# Altium PCB JWpulsegen-V3.PcbDoc
Units mm, origin at the board's own origin, x right, y up, seen from the top; angles counter-clockwise.
Board outline 82.4 x 38.6 mm, 4 copper layers (Top Layer, Layer 1, Layer 2, Bottom Layer), stack 1.587 mm thick; 37 components, 17 nets, 96 pads, 146 vias.
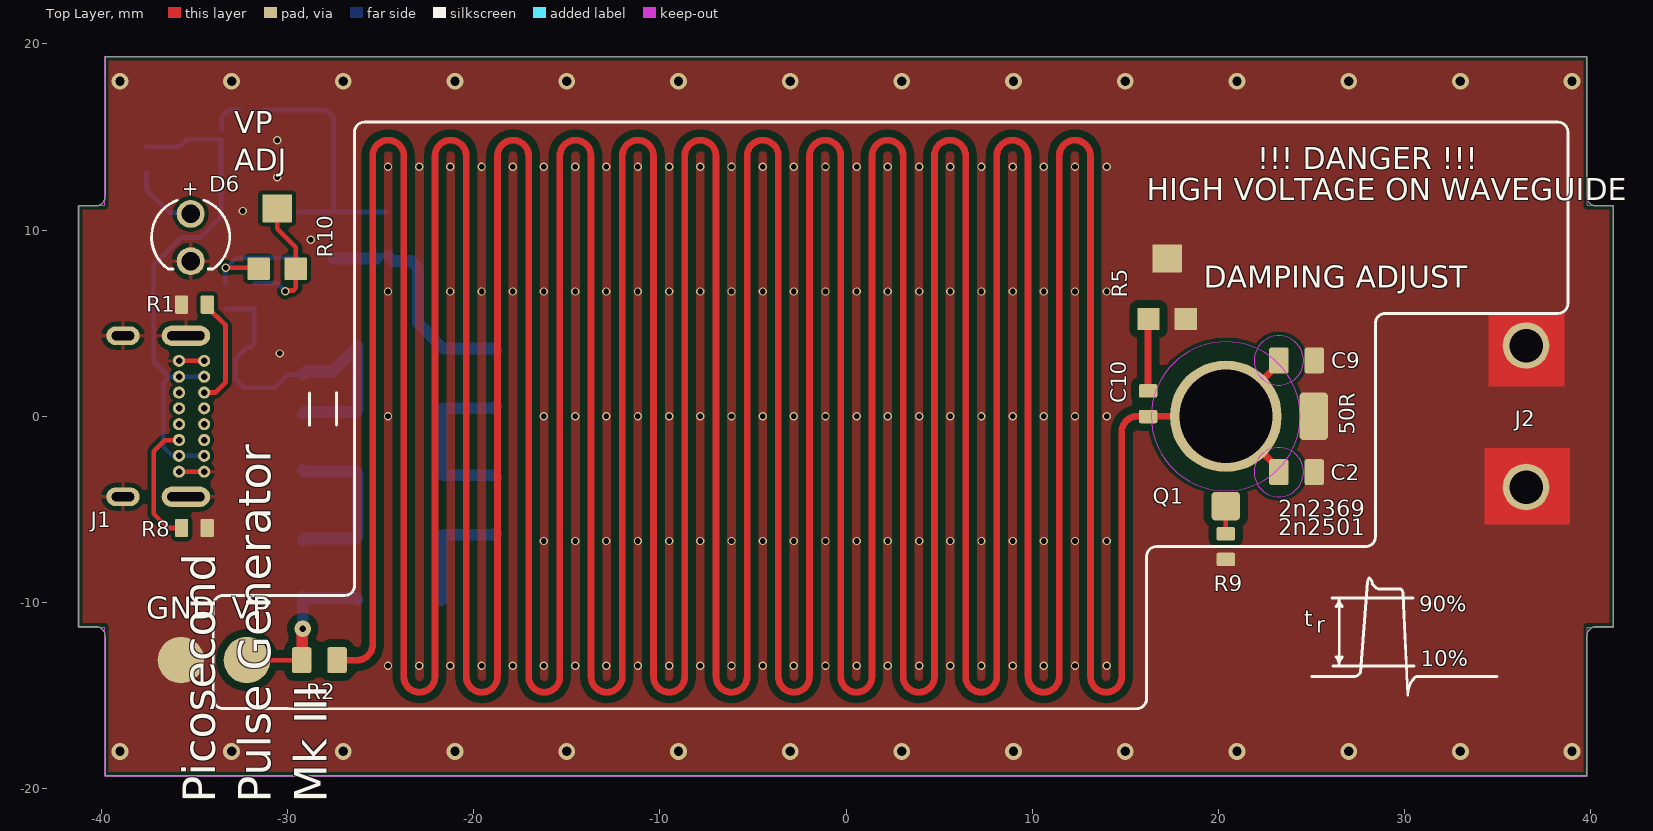
[diagram p0: Top Layer view]
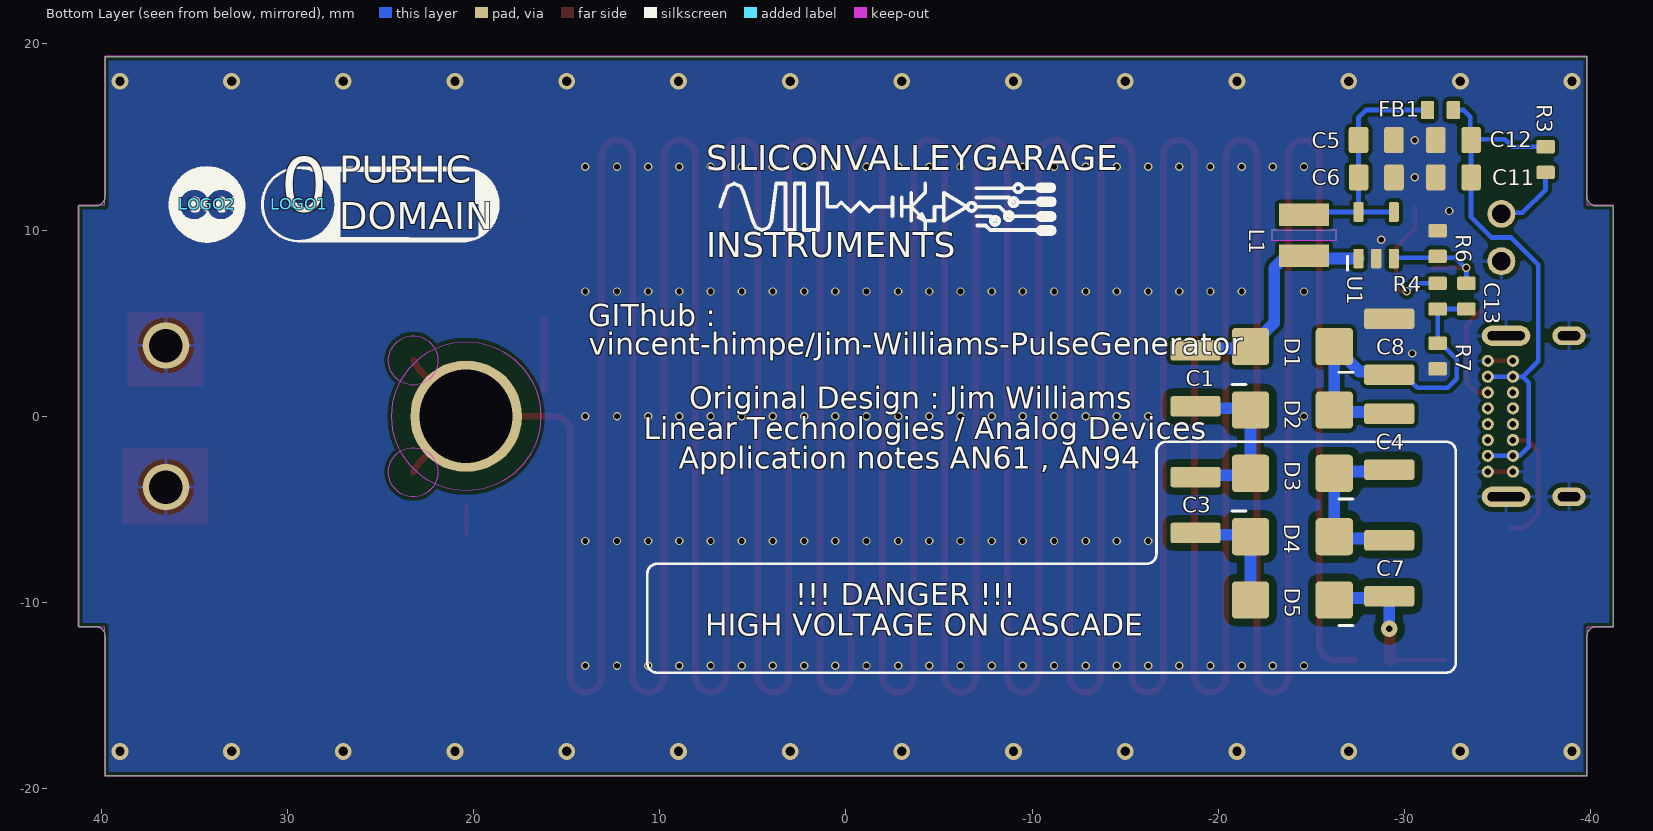
[diagram p1: Bottom Layer view, seen from below]
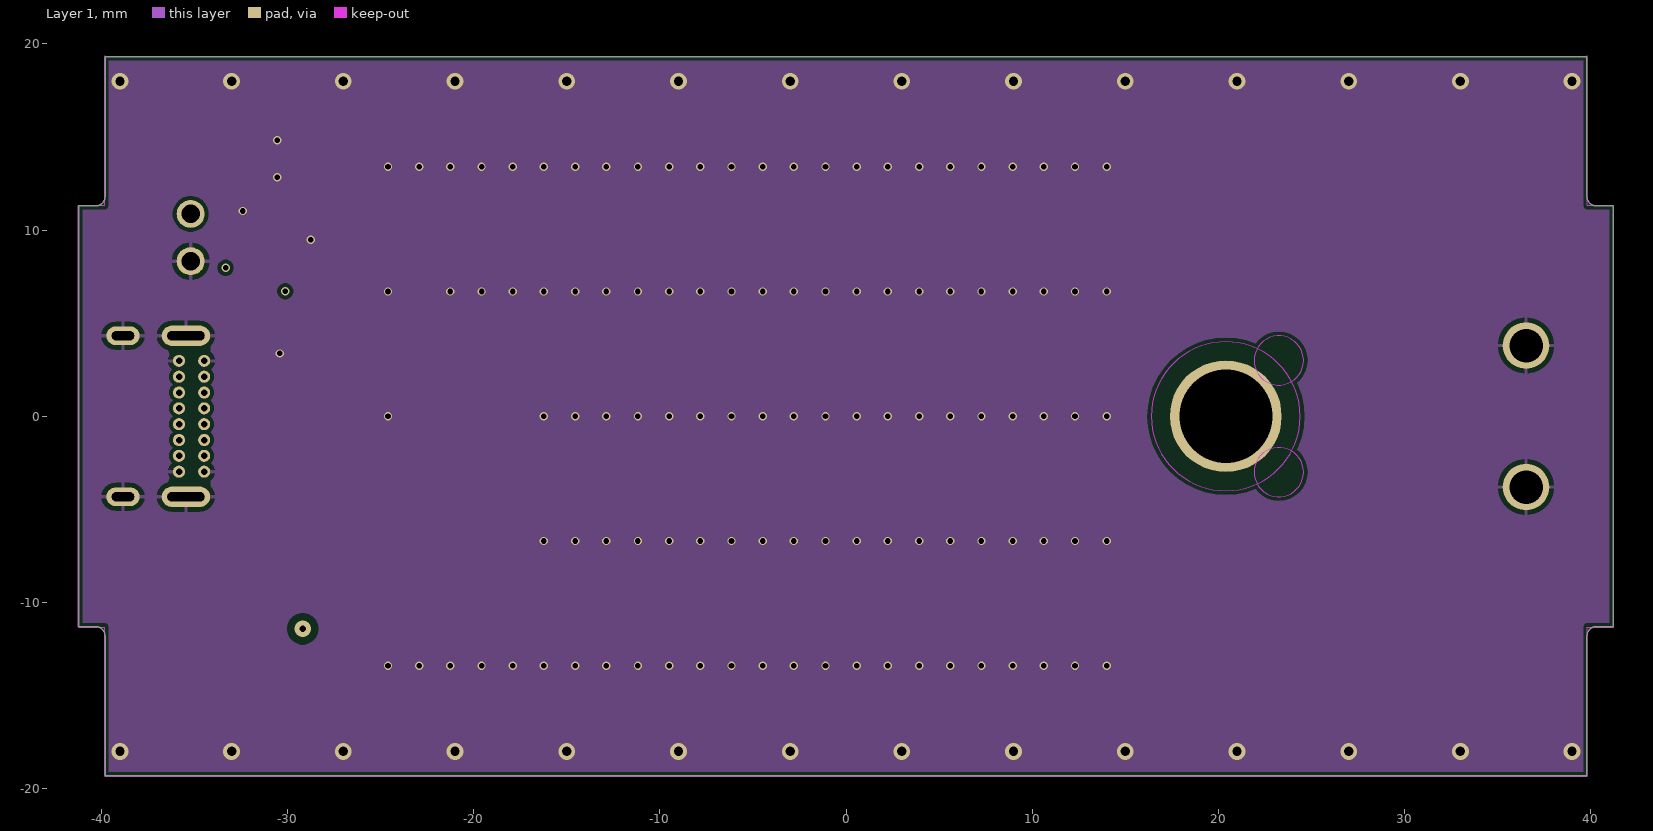
[diagram p2: Layer 1]
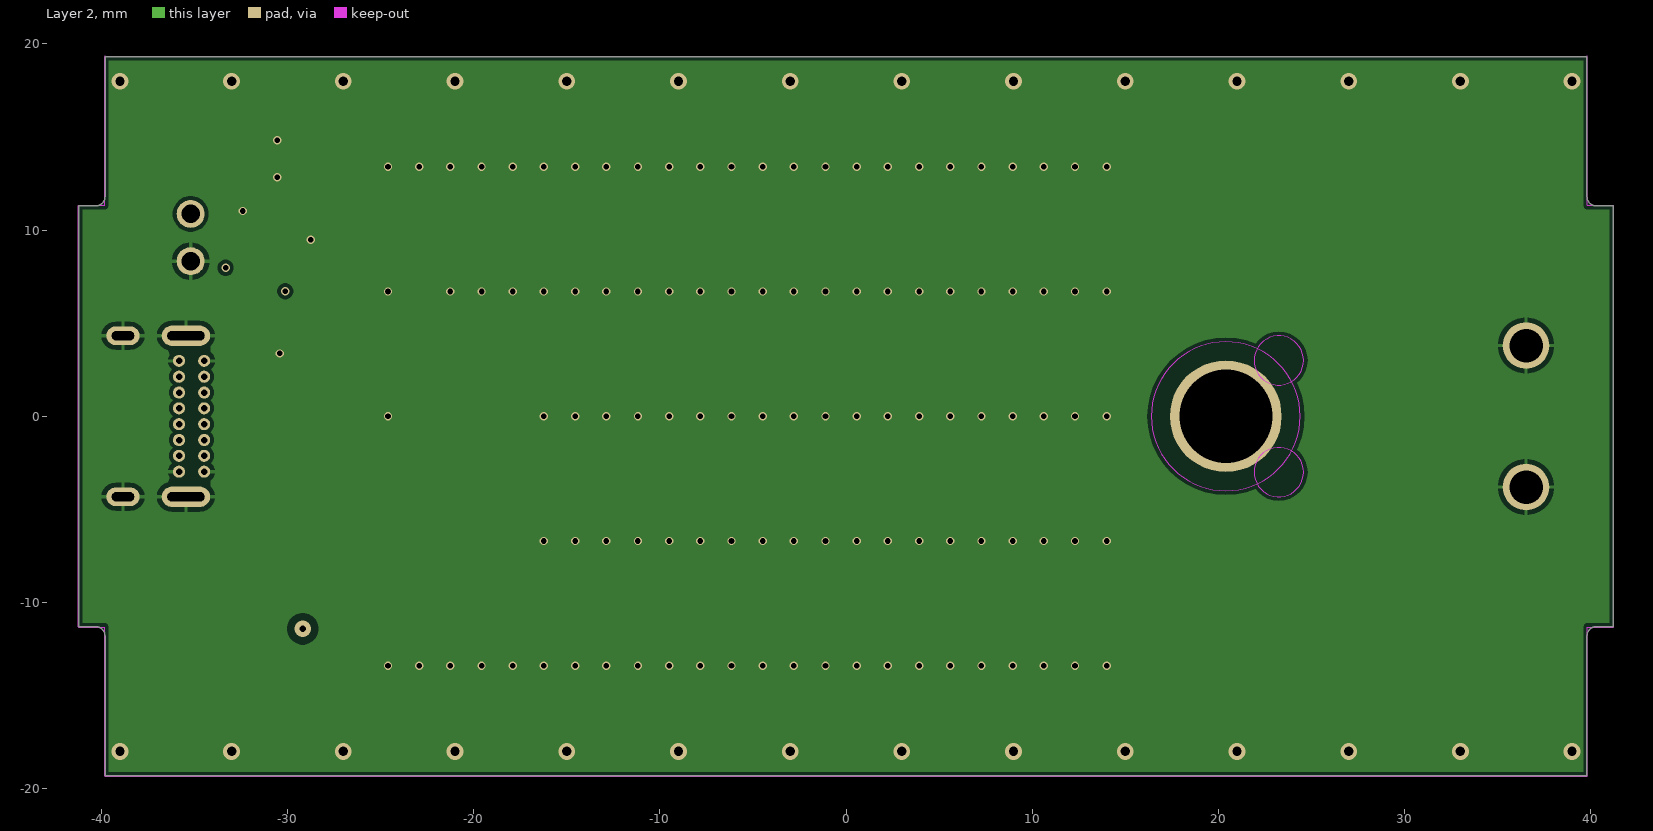
[diagram p3: Layer 2]
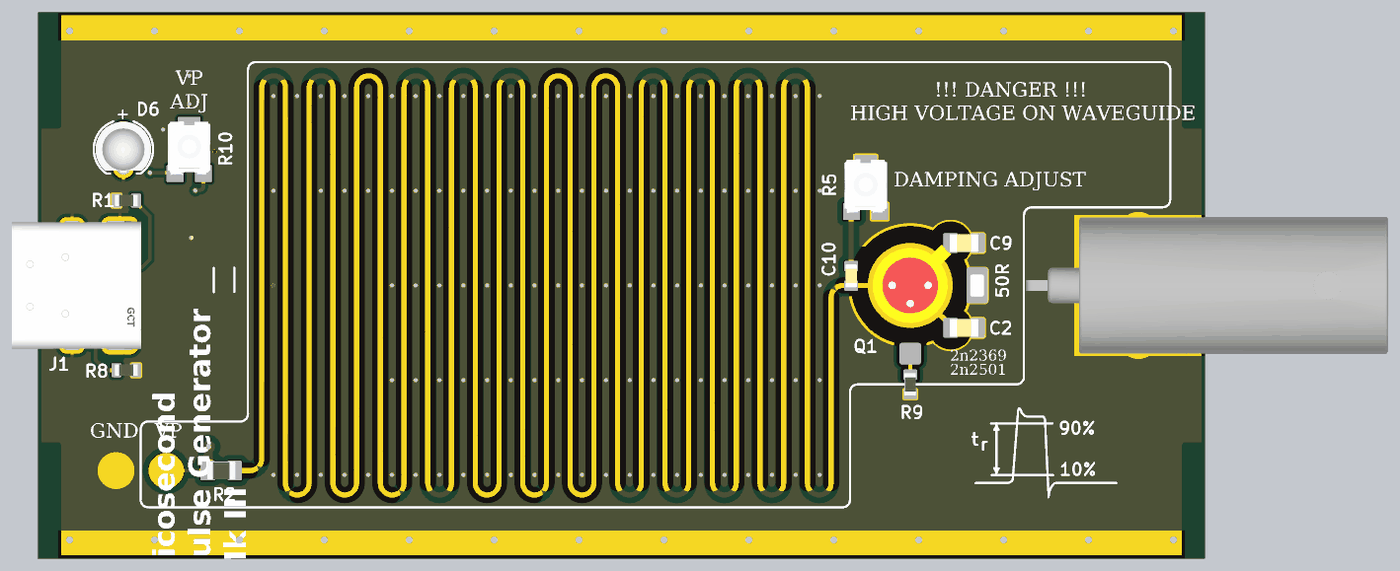
[diagram p4: 3D render of the assembled board from above, using the file's embedded part models]
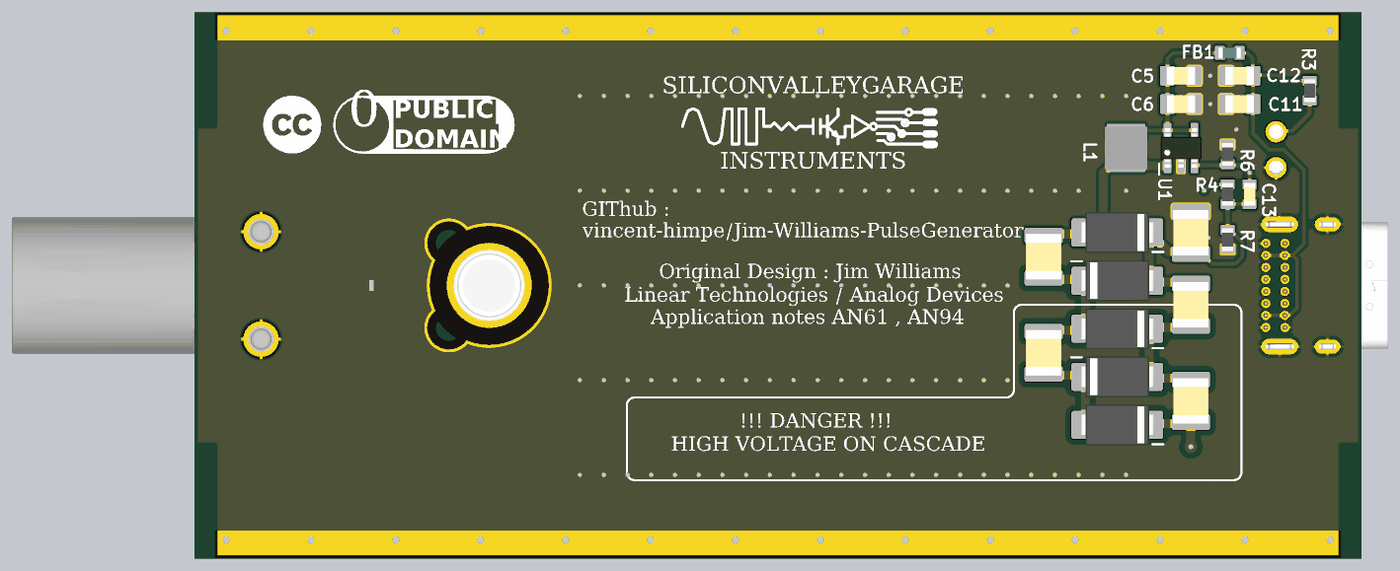
[diagram p5: 3D render of the assembled board from below, using the file's embedded part models]

## Layer stack, top to bottom
Top Solder: solder mask 0.0102, Solder Resist, Dk 3.5
Top Layer: signal copper 0.0356
Dielectric 1: prepreg 0.2104, 7628 X 1, Dk 4.5
Layer 1: signal copper 0.0152
Dielectric1: core 1.065, FR-4, Dk 4.8
Layer 2: signal copper 0.0152
Dielectric 2: prepreg 0.2104, 7628 X 1, Dk 4.5
Bottom Layer: signal copper 0.0356
Bottom Solder: solder mask 0.0102, Solder Resist, Dk 3.5

## Board outline
-41.2,-11.3 -40.3,-11.3 cw(c-40.3,-11.8) -39.8,-11.8 -39.8,-19.3 39.8,-19.3 39.8,-11.8 cw(c40.3,-11.8) 40.3,-11.3 40.298,-11.3 41.2,-11.3 41.2,11.3 40.3,11.3 cw(c40.3,11.8) 39.8,11.8 39.8,19.3 -39.8,19.3 -39.8,11.8 cw(c-40.3,11.8) -40.3,11.3 -41.2,11.3

## Design rules (kind name [scope] priority, off if disabled: settings)
AssemblyTestPointUsage [All] p1 off:
AssemblyTestpoint [All] p1 off: testpointundercomponent=TRUE minsize=1.016 maxsize=2.54 preferedsize=1.524 minholesize=0 maxholesize=1.016 preferedholesize=0.813 testpointgrid=0.025 usegrid=TRUE gridtolerance=0 allowsidetop=TRUE allowsidebottom=TRUE
Clearance WAVEGUIDE-Clearance [InNetClass('WAVEGUIDE') AND OnTopLayer vs InNet('GND')] p1: gap=0.4 ignorepadtopadclearanceinfootprint=FALSE
Clearance HV-CLEARANCE [InNetClass('HV')] p2: gap=0.4 ignorepadtopadclearanceinfootprint=FALSE
Clearance All [All] p3: gap=0.2 ignorepadtopadclearanceinfootprint=FALSE
ComponentClearance [All] p1 off: gap=0.254 collisioncheckmode=3 verticalgap=0.254 showdistances=FALSE
DiffPairsRouting [All] p1 off: maxlimit=0.254 minlimit=0.254 mostfreqgap=0.254 toplayer_minwidth=0.381 toplayer_maxwidth=0.381 toplayer_prefwidth=0.381 midlayer1_minwidth=0.381 midlayer1_maxwidth=0.381 midlayer1_prefwidth=0.381 midlayer2_minwidth=0.381 midlayer2_maxwidth=0.381 midlayer2_prefwidth=0.381 bottomlayer_minwidth=0.381 bottomlayer_maxwidth=0.381 bottomlayer_prefwidth=0.381 maxuncoupledlength=12.7
FabricationTestPointUsage [All] p1 off: valid=0 allowmultiple=FALSE
FabricationTestpoint [All] p1 off: side=3 testpointundercomponent=TRUE minsize=1.016 maxsize=2.54 preferedsize=1.524 minholesize=0 maxholesize=1.016 preferedholesize=0.813 testpointgrid=0.025 allowsidetop=TRUE allowsidebottom=TRUE usegrid=TRUE gridtolerance=0
FanoutControl Fanout_BGA [IsBGA] p1 off: bgadir=Out bgaviamode=Centered fanoutstyle=Auto fanoutdirection=Alternating viagrid=0.025 // Fanout_BGA (Default Rule)
FanoutControl Fanout_LCC [IsLCC] p2 off: bgadir=Out bgaviamode=Centered fanoutstyle=Auto fanoutdirection=Alternating viagrid=0.025 // Fanout_LCC (Default Rule)
FanoutControl Fanout_SOIC [IsSOIC] p3 off: bgadir=Out bgaviamode=Centered fanoutstyle=Auto fanoutdirection=Alternating viagrid=0.025 // Fanout_SOIC (Default Rule)
FanoutControl Fanout_Small [(CompPinCount < 5)] p4 off: bgadir=Out bgaviamode=Centered fanoutstyle=Auto fanoutdirection=OutThenIn viagrid=0.025 // Fanout_Small (Default Rule)
FanoutControl Fanout_Default [All] p5 off: bgadir=Out bgaviamode=Centered fanoutstyle=Auto fanoutdirection=Alternating viagrid=0.025 // Fanout_Default (Default Rule)
Height [All] p1 off: minheight=0 maxheight=25.4 prefheight=12.7
HoleSize [All] p1 off: absolutevalues=TRUE maxlimit=2.54 minlimit=0.025 maxpercent=80.000 minpercent=20.000
HoleToHoleClearance [All] p1 off: gap=0.254 allowstackedmicrovias=TRUE
LayerPairs [All] p1 off: enforce=TRUE
MinimumSolderMaskSliver [All] p1 off: minsoldermaskwidth=0.254
NetAntennae [All] p1 off: netantennaetolerance=0
PasteMaskExpansion [All] p1 off: expansion=0
PlaneClearance [All] p1 off: clearance=0.508
PlaneConnect [All] p1 off: planeconnectstyle=Relief reliefexpansion=0.508 reliefentries=4 reliefconductorwidth=0.254 reliefairgap=0.254
PolygonConnect [All] p1: thpad.connectstyle=Relief thpad.reliefconductorwidth=0.2 thpad.reliefentries=4 thpad.polygonreliefangle="90 Angle" thpad.airgapwidth=0.25 smdpad.connectstyle=Direct smdpad.reliefconductorwidth=0.254 smdpad.reliefentries=4 smdpad.polygonreliefangle="90 Angle" smdpad.airgapwidth=0.254 via.connectstyle=Direct via.reliefconductorwidth=0.254 via.reliefentries=4 via.polygonreliefangle="90 Angle" via.airgapwidth=0.254
RoutingCorners [All] p1 off: cornerstyle=45-Degree minsetback=2.54 maxsetback=2.54
RoutingLayers [All] p1 off: top layer_v5=TRUE mid layer 1_v5=TRUE mid layer 2_v5=TRUE bottom layer_v5=TRUE
RoutingPriority [All] p1 off: routingpriority=0
RoutingTopology [All] p1 off: topology=Shortest
RoutingVias [All] p1: holewidth=0.3 width=0.45 viastyle="Through Hole" minholewidth=0.3 minwidth=0.45 maxholewidth=0.711 maxwidth=1.27
SilkToSilkClearance [All] p1 off: silktosilkclearance=0.254
SilkToSolderMaskClearance SilkscreenOverComponentPads [IsPad] p1 off: minsilkscreentomaskgap=0.254 clearancetoexposedcopper=TRUE
SolderMaskExpansion [All] p1 off: expansion=0.102 istentingtop=FALSE
SupplyNets "Schematic Supply Nets_3" [InNet('VP')] p1: voltage=0.000
SupplyNets "Schematic Supply Nets_1" [InNet('VR')] p2: voltage=0.000
SupplyNets "Schematic Supply Nets_2" [InNet('VBUS')] p3: voltage=0.000
SupplyNets "Schematic Supply Nets" [InNet('GND')] p4: voltage=0.000
Width WAVEGUIDE_ROUTING [InNetClass('WAVEGUIDE') AND OnTopLayer] p1: maxlimit=0.5 minlimit=0.254 preferedwidth=0.36 toplayer_minwidth=0.326 bottomlayer_minwidth=0.326 impedanceprofiledriven=TRUE impedanceprofileid={370E4439-E9AF-4AD6-BD25-A86777D7A306} impedanceprofilevalue=50.000000 minimp=50.000000 maximp=50.000000 favimp=50.000000
Width [All] p2: maxlimit=2.54 minlimit=0.254 preferedwidth=0.254 midlayer1_maxwidth=0.254 midlayer2_maxwidth=0.254 minimp=50.000000 maximp=50.000000 favimp=50.000000
4 further rules are at their usual default settings.

## Classes and differential pairs
net class HV: NetC1_2 NetC3_2 NetC4_2 VP
net class WAVEGUIDE: NetC2_1 NetC10_2 NetQ1_B

## Components (designator, comment, footprint, x,y, rotation, side; value= is the part's Value field where it differs from the comment)
C1 "CAPC-1210-470nF-250V-X7R" CAPC1210 -18.778,2.035 r270 bottom
C2 "CAP0805" CAPC0805 24.2,-3 r0 top
C3 "CAPC-1210-470nF-250V-X7R" CAPC1210 -18.778,-4.765 r270 bottom
C4 "CAPC-1210-470nF-250V-X7R" CAPC1210 -29.178,-1.365 r270 bottom
C5 "CAP0805" CAPC0805 -28.478,14.835 r180 bottom
C6 "CAP0805" CAPC0805 -28.484,12.83 r180 bottom
C7 "CAPC-1210-470nF-250V-X7R" CAPC1210 -29.178,-8.165 r270 bottom
C8 "CAPC-1210-470nF-250V-X7R" CAPC1210 -29.178,3.735 r90 bottom
C9 "CAP0805" CAPC0805 24.2,3 r0 top
C10 "CAP0603" CAPC0603 16.225,0.675 r90 top
C11 "CAP0805" CAPC0805 -32.625,12.83 r0 bottom
C12 "CAP0805" CAPC0805 -32.625,14.835 r0 bottom
C13 "CAP0603" CAPC0603 -33.325,6.45 r270 bottom
D1 "10MQ150N" DO214AC -23.978,3.744 r0 bottom
D2 "10MQ150N" DO214AC -23.978,0.335 r180 bottom
D3 "10MQ150N" DO214AC -23.978,-3.065 r0 bottom
D4 "10MQ150N" DO214AC -23.978,-6.465 r180 bottom
D5 "10MQ150N" DO214AC -23.978,-9.865 r0 bottom
D6 "LED-3MM-GREEN" LED-3MM-GREEN -35.2,9.6 r270 top
FB1 "FB0603" FB0603 -31.925,16.45 r180 bottom value=1KZ
J1 "CONN-USBC-USB2-HOR" CONN-GCT-USB4085 -38.5,0 r270 top
J2 "731000105" CONN-MOLEX-7310000105 41.35,0 r0 top
L1 "10uH" IND-MURATA-LQH3NPZ -24.6,9.725 r270 bottom
LOGO1 "LOGO-LICENSE-CC0-PUBLIC" LOGO-LICENSE-CC0-PUBLIC 29.375,11.375 r180 bottom
LOGO2 "LOGO-LICENSE-CC" LOGO-LICENSE-CC 34.3,11.375 r180 bottom
Q1 "2N2369-JW" SPECIAL-2N2369-JW 20.4,0 r0 top locked
R1 "RESC0603" RESC0603#1 -35,6 r0 top value=5K1
R2 "RESC0805" RESC0805 -28.288,-13.1 r0 top value=1M
R3 "RESC0603" RESC0603#1 -37.574,13.786 r270 bottom value=1K
R4 "RESC0603" RESC0603#1 -31.775,6.45 r270 bottom value=12K
R5 "TRIMMER-BOURNS-TC33X-2-101E" TRIMMER-BOURNS-TC33 17.25,7.025 r90 top value=100R
R6 "RESC0603" RESC0603#1 -31.775,9.275 r90 bottom value=1K2
R7 "RESC0603" RESC0603#1 -31.778,3.235 r270 bottom value=4K7
R8 "RESC0603" RESC0603#1 -35,-6 r0 top value=5K1
R9 "RESC0603" RESC0603#2 20.4,-7 r270 top value=10K
R10 "TRIMMER-BOURNS-TC33X-2-103G" TRIMMER-BOURNS-TC33 -30.551,9.721 r90 top value=10K
U1 "LM2733" SOT23-5 -28.478,9.721 r90 bottom

## Footprints (in the part's own frame and the unit in brackets; to place one, negate y for a bottom-side part, rotate by r counter-clockwise, add the part's x,y. Pads: shape width x height; smd on the part's side, far side on the other; paste and mask are expansions set on the pad)
CAPC0603 [mm] "CAPACITOR, CHIP 0603 (1608) 0.5MM THICK"
  rrect25% 0.72x0.99 smd paste+0 mask+0.075: 1(-0.69,0) 2(0.69,0)
  body extent -0.81,-0.41 0.81,0.41, height 0.51
CAPC0805 [mm] "CAPACITOR, CHIP 0805 (2012) 0.85MM THICK"
  rrect25% 1.05x1.4 smd paste+0 mask+0.075: 1(-0.95,0) 2(0.95,0)
  body extent -1.01,-0.63 1.01,0.64, height 0.86
CAPC1210 [mm] "CAPACITOR CHIP 1210 (3225) 2.00MM THICK"
  rrect25% 1.1x2.7 smd paste+0 mask+0.075: 1(-1.5,0) 2(1.5,0)
  body extent -1.61,-1.26 1.61,1.26, height 2.01
CONN-GCT-USB4085 [mm]
  rrect100% 1.1x2.6 hole 0.5 slot 2 at 90 deg paste-2539.97 mask+0.05: 1(-4.325,3.045) 2(4.325,3.045)
  rrect100% 1x1.8 hole 0.5 slot 1.2 at 90 deg paste-2539.97 mask+0.05: 3(-4.325,-0.335) 4(4.325,-0.335)
  round 0.65 hole 0.35 paste-2539.97 mask+0.05: A1(-2.975,4.025) A4(-2.125,4.025) A5(-1.275,4.025) A6(-0.425,4.025) A7(0.425,4.025) A8(1.275,4.025) A9(2.125,4.025) A12(2.975,4.025) B1(2.975,2.675) B4(2.125,2.675) B5(1.275,2.675) B6(0.425,2.675) B7(-0.425,2.675) B8(-1.275,2.675) B9(-2.125,2.675) B12(-2.975,2.675)
  body extent -4.87,-4.83 4.87,4.83, height 0.25
CONN-MOLEX-7310000105 [mm]
  round 2.5 hole 1.8 unplated paste-2539.97 mask+0.15: 2(-4.825,3.8) 3(-4.825,-3.8)
  body extent -12.77,-4.82 12.78,4.83, height 9.3
DO214AC [mm] "DO214AC, SMA"
  rrect20% 2x2 smd mask+0.07: 1(-2.25,0) 2(2.25,0)
  silkscreen extent -3.25,1.38 -2.5,1.38, body extent -2.6,-1.45 2.6,1.45, height 2.31
FB0603 [mm] "FERRITE BEAD 0603 (1608)"
  rrect25% 0.72x0.99 smd mask+0.075: 1(-0.69,0) 2(0.7,0)
  body extent -0.8,-0.4 0.8,0.4, height 0.95
IND-MURATA-LQH3NPZ [mm]
  rrect8% 1.2x2.7 smd mask+0.05: 1(-1.1,0) 2(1.1,0)
  Top Layer keep-out region: -0.3,1.7 0.3,1.7 0.3,-1.7 -0.3,-1.7
  body extent -1.5,-1.5 1.5,1.5, height 1.51
LED-3MM-GREEN [mm]
  round 1.5 hole 1: 1(1.27,0) 2(-1.27,0)
  silkscreen extent -2,-2.1 1.69,2.1, body extent -1.99,-1.96 1.63,1.96, height 5.35
LOGO-LICENSE-CC [mm]
  silkscreen extent -2.08,-2.05 2.03,2.05
LOGO-LICENSE-CC0-PUBLIC [mm]
  silkscreen extent -1.97,-1.98 10.7,1.98
RESC0603#1 [mm] "RESISTOR, CHIP 0603 (1608)"
  rrect25% 0.72x0.99 smd paste+0 mask+0.075: 1(-0.69,0) 2(0.69,0)
  body extent -0.8,-0.4 0.8,0.4, height 0.37
RESC0603#2 [mm] "RESISTOR, CHIP 0603 (1608)"
  rrect25% 0.72x0.99 smd paste+0 mask+0.2: 1(-0.69,0)
  rrect25% 0.72x0.99 smd paste+0 mask+0.075: 2(0.69,0)
  body extent -0.8,-0.4 0.8,0.4, height 0.37
RESC0805 [mm] "RESISTOR, CHIP 0805 (2012)"
  rrect25% 1.05x1.4 smd paste+0 mask+0.075: 1(-0.95,0) 2(0.95,0)
  body extent -1,-0.63 1,0.63, height 0.47
SOT23-5 [mm] "SOT23 PACKAGE, 5 PIN (SOT25)"
  rrect25% 1.05x0.55 smd paste+0 mask+0.075: 1(-1.25,0.95) 2(-1.25,0) 3(-1.25,-0.95) 4(1.25,-0.95) 5(1.25,0.95)
  silkscreen extent -1.88,1.55 -1.12,1.55, body extent -1.4,-1.46 1.4,1.44, height 1.45
SPECIAL-2N2369-JW [mil]
  rrect25% 60x60 smd mask+7.87: B(0,-190)
  round 236.22 hole 196.85 mask+5.91: C(0,0)
  rrect25% 60x100 smd mask+1.97: G(186,0)
  body extent -148,-200 285,174, height 140
TRIMMER-BOURNS-TC33 [mm]
  rrect8% 1.2x1.2 smd: 1(-1.8,1) 3(-1.8,-1)
  rrect6% 1.5x1.6 smd: 2(1.45,0)
  body extent -1.9,-1.5 1.9,1.5, height 1.1

## Part data
C1 C3 C4 C7 C8: "CAPACITOR,CERAMIC,470nF,250V,X7R,1210", Capacitance=470nF, Dielectric=X7R, Manufacturer 1=WALSIN, Manufacturer Part Number 1=SH43B474K251CT, Package / Case="1210 (3225 METRIC)", Supplier Part Number 1=80-C1210C474KARACTU, Voltage=250V, MOUSER=791-SH43B474K251CT, Supplier 1=Mouser, Supplier 2=Digikey, Supplier 3=Digikey, Supplier 4=Mouser, Supplier 5=Mouser, Supplier Part Number 2=4587-C1210X474K251TCT-ND, Supplier Part Number 3=4713-CHV1210N250474KXTCT-ND, Supplier Part Number 4=80-C1210C474KARAUTO, Supplier Part Number 5=80-C1210X474KARAUTO
C2 C9: library part CAPC-0805-2pF-250V-C0G-HIQ, "CAPACITOR,CERAMIC,2pF,250V,C0G,0805,HIQ", Capacitance=2pF, Dielectric=C0G, Manufacturer 1=JOHANSON, Manufacturer Part Number 1=251R15S2R0AV4E, Package / Case="0805 (2012 metric)", Voltage=250V, MOUSER=609-251R15S2R0AV4E, SPECIAL=Hi-Q
C5 C6 C11 C12: library part CAPC-0805-10uF-25V, "CAPACITOR,CERAMIC,10uF,25V,X5R,0805", Capacitance=10uF, Dielectric=X7R, LCSC=C3039694, Manufacturer 1=SAMSUNG, Manufacturer Part Number 1=CL21B106KAYQNNE, Package / Case="0805 (2012 metric)", Voltage=25V, MOUSER=187-CL21B106KAYQNNE
C10: library part CAPC-0603-12PF-50V-C0G, "CAPACITOR,CERAMIC,12pF,50V,C0G,0603", Capacitance=12pF, Dielectric=C0G, Package / Case=0603, Voltage=50V
C13: library part CAPC-0603-1nF-250V-X7R, "CAPACITOR,CERAMIC,1nF,250V,X7R,0603", Capacitance=1nF, Dielectric=X7R, LCSC=C277510, Package / Case=0603, Supplier Part Number 1=311-4104-1-ND, Voltage=250V, Supplier 1=Digikey
D1 D2 D3 D4 D5: library part DIODE-SCHOTTKY-SMC-10MQ150N, "DIODE,SCHOTTKY,150V,1A,10MQ150N,DO214AC(SMA)", Supplier Part Number 1=1655-10MQ150NCT-ND, Supplier 1=Digikey
D6: "LED,TH,GREEN,42mCd,3MM", Manufacturer 1=WURTH, Manufacturer Part Number 1=151031VS06000, Supplier Part Number 1=78-VLMPG33N1P2, MOUSER=78-VLMPG33N1P2, Supplier 1=Mouser
FB1: library part FB0603-1KZ-0R2, "FERRITE,1KZ@100MHz,0R2DC,0603", LCSC=C160982, Manufacturer 1=MURATA, Manufacturer Part Number 1=BLM18KG102SN1D, MOUSER=81-BLM18KG102SN1D, Supplier 1="Arrow Electronics", Supplier Part Number 1=BLM18KG102SN1D
J1: "CONN,USB-C,16P,RA,TH,8.94X9.17", LCSC=C36936564, Supplier Part Number 1=2073-USB4085-GF-ACT-ND, Supplier 1=Digikey
J2: library part CONN-MOLEX-7310000105, "CONN,BNC,RA", Manufacturer 1=MOLEX, Manufacturer Part Number 1=7310000105
L1: library part IND-MURATA-LQH3NPZ100MMEL, "IND,10uH,1.2A,3X3, LQH3NPZ100MMEL", LCSC=C701168, Supplier Part Number 1=LQH3NPZ100MMEL, Supplier 1="Arrow Electronics"
Q1: library part SPECIAL-2N2369-JW, Supplier Part Number 1=610-2N2369A, Supplier 1=Mouser
R1 R8: library part RESC-0603-5K1-1%-1/10W, "RESISTOR,5K1,1%,100mW,0603 (1608)", LCSC=C105580, Manufacturer 1=YAGEO, Manufacturer Part Number 1=RC0603FR-075K1L, Power=1/10W, Tolerance=1%, MOUSER=603-RC0603FR-075K1
R2: library part RESC-0805-1M-1%-1/8W_1, "RESISTOR,1M,1%,125mW,0805", Manufacturer 1=VISHAY, Manufacturer Part Number 1=RCV08051M00FKEA, Power=1/8W, Tolerance=1%, MOUSER=71-RCV08051M00FKEA
R3: library part RESC-0603-1K-1%-1/10W, "RESISTOR,1K,1%,100mW,0603 (1608)", LCSC=C22548, Manufacturer 1=YAGEO, Manufacturer Part Number 1=RC0603FR-071KL, Power=1/10W, Tolerance=1%, MOUSER=603-RC0603FR-071KL
R4: library part RESC-0603-12K-1%-1/10W, "RESISTOR,12K,1%,100mW,0603 (1608)", Power=1/10W, Supplier Part Number 1=RMCF0603FT12K0CT-ND, Tolerance=1%, Supplier 1=Digikey, Supplier 2=Digikey, Supplier 3=Avnet, Supplier 4=Digikey, Supplier Part Number 2=2019-RK73H1JTTD1202FCT-ND, Supplier Part Number 3=73AC9048, Supplier Part Number 4=13-AC0603FR-1012KLCT-ND
R5: "RES,TRIM,SMD,100R", Manufacturer 1=BOURNS, Manufacturer Part Number 1=TC33X-2-101E, MOUSER=652-TC33X-2-101E
R6: library part RESC-0603-1K2-1%-1/10W, "RESISTOR,1K2,1%,100mW,0603 (1608)", Manufacturer 1=STACKPOLE, Manufacturer Part Number 1=RMCF0603FT1K20, Power=1/10W, Supplier Part Number 1=RMCF0603FT12K0CT-ND, Tolerance=1%, MOUSER=708-RMCF0603FT1K20, Supplier 1=Digikey, Supplier 2=Digikey, Supplier 3=Avnet, Supplier 4=Digikey, Supplier Part Number 2=2019-RK73H1JTTD1202FCT-ND, Supplier Part Number 3=73AC9048, Supplier Part Number 4=13-AC0603FR-1012KLCT-ND
R7: library part RESC-0603-4K7-1%-1/10W, "RESISTOR,4K7,1%,100mW,0603 (1608)", LCSC=C99782, Manufacturer 1=YAGEO, Manufacturer Part Number 1=RC0603FR-074K7L, Power=1/10W, Supplier Part Number 1=5489695, Tolerance=1%, MOUSER=603-RC0603FR-074K7L, Supplier 1="Future Electronics", Supplier 2=Digikey, Supplier 3=Digikey, Supplier 4=Avnet, Supplier Part Number 2=P4.70KHCT-ND, Supplier Part Number 3=RMCF0603FT4K70CT-ND, Supplier Part Number 4=1622960-1
R9: library part RESC-0603-10K-1%-1/10W, "RESISTOR,10K,1%,100mW,0603 (1608)", LCSC=C98220, Manufacturer 1=YAGEO, Manufacturer Part Number 1=RC0603FR-0710KL, Power=1/10W, Supplier Part Number 1=4023214, Tolerance=1%, MOUSER=603-RC0603FR-0710KL, Supplier 1="Future Electronics", Supplier 2=Digikey, Supplier 3=Mouser, Supplier Part Number 2=RMCF0603FT10K0CT-ND, Supplier Part Number 3=667-ERJ-3EKF1002V
R10: "RES,TRIM,SMD,10K", Manufacturer 1=BOURNS, Manufacturer Part Number 1=TC33X-2-103G, MOUSER=652-TC33X-2-103G
U1: library part IC-TI-LM2733, "PMIC,BOOST,LM2733,SOT23-5", Supplier Part Number 1=926-LM2733YMF/NOPB, Supplier 1=Mouser, Supplier 2=Mouser, Supplier 3="Arrow Electronics", Supplier 4=Mouser, Supplier 5=Mouser, Supplier 6="Bison Technologies", Supplier Part Number 2=926-LM2733XMF/NOPB, Supplier Part Number 3=LM2733XMF, Supplier Part Number 4=926-LM2733XMFX/NOPB, Supplier Part Number 5=926-LM2733YMF, Supplier Part Number 6=LM2733XMFX-256963

## Free pads (board coordinates)
  round 2.5 smd paste-2539.97 mask+0.05: 4(-32.176,-13.1) 5(-35.721,-13.1)

## Via types
v1: diameter 0.45, hole 0.3, Top Layer to Bottom Layer, tented both sides, 117 vias
v2: diameter 0.9, hole 0.5, Top Layer to Bottom Layer, tented both sides, 28 vias
v3: diameter 0.889, hole 0.356, Top Layer to Bottom Layer, tented both sides, 1 vias

## Nets (pads, with @x,y where several pads share a name; then routed paths per layer and width w, separated by ;. In a path a pad name is that pad's centre, name@x,y a point inside that pad or via, vN(x,y) a via of type N, cw(c..) or ccw(c..) an arc to the next point about the centre after c; other vN are vias at no path point)
GND: C2.2 C5.2 C6.2 C8.2 C9.2 C11.2 C12.2 D6.1 J1.1 J1.2 J1.3 J1.4 J1.A1 J1.A12 J1.B1 J1.B12 J2.2 J2.3 pad.5 Q1.G R1.1 R5.2 R5.3 R6.2 R7.2 R8.2 R9.2 U1.2 | length 2.7
  Top Layer w0.254: J1.B1 J1.A12 ; J1.B12 J1.A1
  other v1: -24.6,-13.4 -22.925,-13.4 -21.25,-13.4 -19.575,-13.4 -17.9,-13.4 -16.225,-13.4 -14.55,-13.4 -12.875,-13.4 -11.175,-13.4 -9.5,-13.4 -7.825,-13.4 -6.15,-13.4 -4.475,-13.4 -2.8,-13.4 -1.1,-13.4 0.575,-13.4 2.25,-13.4 3.925,-13.4 5.6,-13.4 7.275,-13.4 8.95,-13.4 10.625,-13.4 12.3,-13.4 14,-13.4 -16.225,-6.7 -14.55,-6.7 -12.875,-6.7 -11.175,-6.7 -9.5,-6.7 -7.825,-6.7 -6.15,-6.7 -4.475,-6.7 -2.8,-6.7 -1.1,-6.7 0.575,-6.7 2.25,-6.7 3.925,-6.7 5.6,-6.7 7.275,-6.7 8.95,-6.7 10.625,-6.7 12.3,-6.7 14,-6.7 -24.6,0 -16.225,0 -14.55,0 -12.875,0 -11.175,0 -9.5,0 -7.825,0 -6.15,0 -4.475,0 -2.8,0 -1.1,0 0.575,0 2.25,0 3.925,0 5.6,0 7.275,0 8.95,0 10.625,0 12.3,0 14,0 -30.41,3.375 -24.6,6.7 -21.25,6.7 -19.575,6.7 -17.9,6.7 -16.225,6.7 -14.55,6.7 -12.875,6.7 -11.175,6.7 -9.5,6.7 -7.825,6.7 -6.15,6.7 -4.475,6.7 -2.8,6.7 -1.1,6.7 0.575,6.7 2.25,6.7 3.925,6.7 5.6,6.7 7.275,6.7 8.95,6.7 10.625,6.7 12.3,6.7 14,6.7 -28.748,9.491 -32.4,11.025 -30.551,12.83 -24.6,13.4 -22.925,13.4 -21.25,13.4 -19.575,13.4 -17.9,13.4 -16.225,13.4 -14.55,13.4 -12.875,13.4 -11.175,13.4 -9.5,13.4 -7.825,13.4 -6.15,13.4 -4.475,13.4 -2.8,13.4 -1.1,13.4 0.575,13.4 2.25,13.4 3.925,13.4 5.6,13.4 7.275,13.4 8.95,13.4 10.625,13.4 12.3,13.4 14,13.4 -30.551,14.835
  other v2: -39,-18 -33,-18 -27,-18 -21,-18 -15,-18 -9,-18 -3,-18 3,-18 9,-18 15,-18 21,-18 27,-18 33,-18 39,-18 -39,18 -33,18 -27,18 -21,18 -15,18 -9,18 -3,18 3,18 9,18 15,18 21,18 27,18 33,18 39,18
NetC1_1: C1.1 D1.2 L1.2 U1.1 | length 12.6
  Bottom Layer w0.254: U1.1 U1.1@-27.528,8.477 ; L1.2@-25.179,8.625 L1.2
  Bottom Layer w0.635: U1.1 L1.2@-25.179,8.471 ; L1.2 -24.317,8.342 -23.372,8.342 -23,7.971 -23,5.016 -21.623,3.639 -18.882,3.639 C1.1
NetC1_2: C1.2 C3.1 D2.1 D3.2 | length 9.5
  Bottom Layer w0.635: C3.1 -18.878,-3.165 -21.628,-3.165 D3.2 D2.1 -21.628,0.435 -18.878,0.435 C1.2
NetC2_1: C2.1 C9.1 C10.1 Q1.C R2.2 | length 763
  Top Layer w0.36: R2.2 -26.265,-13.1 ccw(c-26.265,-12.262) -25.427,-12.262 -25.427,13.992 cw(c-24.589,13.992) -24.589,14.83 cw(c-24.589,13.992) -23.75,13.992 ; -23.75,13.992 -23.75,-13.992 -23.75,-13.987 ccw(c-22.912,-13.987) -22.912,-14.825 ccw(c-22.912,-13.987) -22.074,-13.987 ; -22.074,-13.992 -22.074,13.992 ; -22.074,13.992 cw(c-21.236,13.992) -21.236,14.83 cw(c-21.236,13.992) -20.398,13.992 ; -20.398,-13.992 -20.398,13.992 ; -20.398,-13.987 ccw(c-19.559,-13.987) -19.559,-14.825 ccw(c-19.559,-13.987) -18.721,-13.987 ; -18.721,-13.992 -18.721,13.992 ; -18.721,13.992 cw(c-17.883,13.992) -17.883,14.83 cw(c-17.883,13.992) -17.045,13.992 ; -17.045,-13.992 -17.045,13.992 ; -17.045,-13.987 ccw(c-16.207,-13.987) -16.207,-14.825 ccw(c-16.207,-13.987) -15.368,-13.987 ; -15.368,-13.992 -15.368,13.992 ; -15.368,13.992 cw(c-14.53,13.992) -14.53,14.83 cw(c-14.53,13.992) -13.692,13.992 ; -13.692,-13.992 -13.692,13.992 ; -13.692,-13.987 ccw(c-12.854,-13.987) -12.854,-14.825 ccw(c-12.854,-13.987) -12.016,-13.987 ; -12.016,-13.992 -12.016,13.992 ; -12.016,13.992 cw(c-11.177,13.992) -11.177,14.83 cw(c-11.177,13.992) -10.339,13.992 ; -10.339,-13.992 -10.339,13.992 ; -10.339,-13.987 ccw(c-9.501,-13.987) -9.501,-14.825 ccw(c-9.501,-13.987) -8.663,-13.987 ; -8.663,-13.992 -8.663,13.992 ; -8.663,13.992 cw(c-7.825,13.992) -7.825,14.83 cw(c-7.825,13.992) -6.986,13.992 ; -6.986,-13.992 -6.986,13.992 ; -6.986,-13.987 ccw(c-6.148,-13.987) -6.148,-14.825 ccw(c-6.148,-13.987) -5.31,-13.987 ; -5.31,-13.992 -5.31,13.992 ; -5.31,13.992 cw(c-4.472,13.992) -4.472,14.83 cw(c-4.472,13.992) -3.634,13.992 ; -3.634,-13.992 -3.634,13.992 ; -3.634,-13.987 ccw(c-2.795,-13.987) -2.795,-14.825 ccw(c-2.795,-13.987) -1.957,-13.987 ; -1.957,-13.992 -1.957,13.992 ; -1.957,13.992 cw(c-1.119,13.992) -1.119,14.83 cw(c-1.119,13.992) -0.281,13.992 ; -0.281,-13.992 -0.281,13.992 ; -0.281,-13.987 ccw(c0.557,-13.987) 0.557,-14.825 ccw(c0.557,-13.987) 1.396,-13.987 ; 1.396,-13.992 1.396,13.992 ; 1.396,13.992 cw(c2.234,13.992) 2.234,14.83 cw(c2.234,13.992) 3.072,13.992 ; 3.072,-13.992 3.072,13.992 ; 3.072,-13.987 ccw(c3.91,-13.987) 3.91,-14.825 ccw(c3.91,-13.987) 4.748,-13.987 ; 4.748,-13.992 4.748,13.992 ; 4.748,13.992 cw(c5.587,13.992) 5.587,14.83 cw(c5.587,13.992) 6.425,13.992 ; 6.425,-13.992 6.425,13.992 ; 6.425,-13.987 ccw(c7.263,-13.987) 7.263,-14.825 ccw(c7.263,-13.987) 8.101,-13.987 ; 8.101,-13.992 8.101,13.992 ; 8.101,13.992 cw(c8.939,13.992) 8.939,14.83 cw(c8.939,13.992) 9.778,13.992 ; 9.778,-13.992 9.778,13.992 ; 9.778,-13.987 ccw(c10.616,-13.987) 10.616,-14.825 ccw(c10.616,-13.987) 11.454,-13.987 ; 11.454,-13.992 11.454,13.992 ; 11.454,13.992 cw(c12.292,13.992) 12.292,14.83 cw(c12.292,13.992) 13.13,13.992 ; 13.13,-13.992 13.13,13.992 ; 13.13,-13.987 ccw(c13.969,-13.987) 13.969,-14.825 ccw(c13.969,-13.987) 14.807,-13.987 ; 14.807,-13.992 14.807,-0.838 cw(c15.645,-0.838) 15.645,0 Q1.C ; C2.1 22.888,-2.463 Q1.C ; C9.1 22.888,2.463 Q1.C
NetC3_2: C3.2 D4.1 D5.2 | length 6.4
  Bottom Layer w0.635: D5.2 D4.1 -21.628,-6.365 -18.878,-6.365 C3.2
NetC4_2: C4.2 C7.1 D3.1 D4.2 | length 9.5
  Bottom Layer w0.635: C7.1 -29.078,-6.565 -26.328,-6.565 D4.2 D3.1 -26.328,-2.965 -29.078,-2.965 C4.2
NetC5_1: C5.1 C6.1 FB1.1 L1.1 U1.4 U1.5 | length 13.7
  Bottom Layer w0.254: FB1.1 -27.925,16.45 -27.528,16.053 C5.1 U1.5 ; U1.4 U1.5 ; L1.1@-24.678,10.971 U1.5
NetC10_2: C10.2 R5.1 | length 3.9
  Top Layer w0.326: R5.1@16.225,5.2 R5.1
  Top Layer w0.36: C10.2 R5.1@16.225,5.2
NetC13_1: C13.1 R6.1 R10.1 U1.3 | length 6.8
  Top Layer w0.254: v1(-33.325,7.972) -31.603,7.972 R10.1
  Bottom Layer w0.254: C13.1 v1(-33.325,7.972) -33.272,7.972 -32.734,8.511 -29.468,8.511 U1.3
NetD6_2: D6.2 R3.2 | length 3.8
  Bottom Layer w0.254: R3.2 -37.574,12.171 -36.331,10.927 -35.257,10.927 D6.2
NetJ1_A5: J1.A5 R1.2 | length 6
  Top Layer w0.254: J1.A5 -33.878,1.275 -33.325,1.828 -33.325,4.88 -34.31,5.865 R1.2
NetJ1_B5: J1.B5 R8.1 | length 6.8
  Top Layer w0.254: J1.B5 -35.845,-1.295 -36.595,-1.295 -37.182,-1.882 -37.182,-5.249 -36.431,-6 R8.1
NetQ1_B: Q1.B R9.1 | length 1.5
  Top Layer w0.254: R9.1 20.4,-6.077 20.4,-5.397 Q1.B
NetR4_1: R4.1 R10.2 R10.3 | length 7.2
  Top Layer w0.254: R10.2 -30.551,10.069 -29.551,9.069 R10.3 -29.551,6.901 -29.7,6.753 -30.084,6.753 v1(-30.121,6.715)
  Bottom Layer w0.254: R4.1 -30.553,7.14 -30.128,6.715 v1(-30.121,6.715)
VBUS: C11.1 C12.1 FB1.2 J1.A4 J1.A9 J1.B4 J1.B9 R3.1 | length 29.3
  Bottom Layer w0.254: R3.1 -35.789,14.476 -35.39,14.875 -33.615,14.875 C12.1 C11.1 -33.575,10.699 -34.674,9.6 -35.726,9.6 -37.182,8.144 -37.182,2.947 -36.36,2.125 ; J1.A9 J1.B4 -36.177,-2.125 -36.677,-1.625 -36.677,1.808 -36.36,2.125 ; J1.A4 J1.B9 -36.36,2.125 ; C12.1@-33.536,15.404 -33.536,16.089 -33.175,16.45 FB1.2
VP: C7.2 D5.1 pad.4 R2.1 | length 9.4
  Top Layer w0.254: pad.4 R2.1
  Top Layer w0.635: R2.1 -29.208,-13.07 -29.208,-11.445 v3(-29.178,-11.415)
  Bottom Layer w0.635: v3(-29.178,-11.415) C7.2 -29.078,-9.765 -26.328,-9.765 D5.1
VR: C4.1 C8.1 C13.2 D1.1 D2.2 R4.2 R7.1 | length 19.9
  Bottom Layer w0.254: C13.2@-33.298,5.76 -31.778,5.76 R7.1 -32.011,3.692 -32.178,3.692 -32.8,3.07 -32.8,2.019 -32.314,1.534 -30.679,1.534 -29.978,2.235 C8.1
  Bottom Layer w0.635: C4.1 -29.078,0.235 -26.328,0.235 D2.2 D1.1 -27.562,2.41 -29.003,2.41 C8.1
pads on no net: J1.A6 J1.A7 J1.A8 J1.B6 J1.B7 J1.B8

## Polygon pours and split planes (outlines as drawn)
GND on Top Layer "GND_USB" (solid, remove dead copper, pour order 0): -42,19.5 41.6,19.5 41.6,-19.5 -42,-19.5
GND on Layer 1 "GND_USB" (solid, remove dead copper, pour order 1): -42,19.5 41.6,19.5 41.6,-19.5 -42,-19.5
GND on Layer 2 "GND_USB" (solid, remove dead copper, pour order 2): -42,19.5 41.6,19.5 41.6,-19.5 -42,-19.5
GND on Bottom Layer "GND_USB" (solid, remove dead copper, pour order 3): -42,19.5 41.6,19.5 41.6,-19.5 -42,-19.5

## Keep-outs
Top Layer:
  circle w0.01: c23.25,-3 r1.326
  circle w0.01: c23.25,3 r1.326
  circle w0.01: c20.4,0 r4
Layer 1:
  circle w0.01: c23.25,3 r1.326
  circle w0.01: c23.25,-3 r1.326
  circle w0.01: c20.4,0 r4
Layer 2:
  circle w0.01: c23.25,-3 r1.326
  circle w0.01: c23.25,3 r1.326
  circle w0.01: c20.4,0 r4
Bottom Layer:
  circle w0.01: c23.25,-3 r1.326
  circle w0.01: c23.25,3 r1.326
  circle w0.01: c20.4,0 r4
Keep-Out Layer:
  lines w0.05: -41.225,-11.3 ccw(c-41.2,-11.3) -41.2,-11.325 ; -41.225,-11.3 ccw(c-41.2,-11.3) -41.2,-11.325 ; -41.225,-11.3 -41.225,11.3 ; -41.225,11.3 cw(c-41.2,11.3) -41.2,11.325 ; -41.225,11.3 cw(c-41.2,11.3) -41.2,11.325 ; -41.2,-11.325 -39.825,-11.325 -39.825,-19.3 ; -41.2,11.325 -39.825,11.325 -39.825,19.3 ; -39.825,-19.3 ccw(c-39.8,-19.3) -39.8,-19.325 ; -39.825,-19.3 ccw(c-39.8,-19.3) -39.8,-19.325 ; -39.825,19.3 cw(c-39.8,19.3) -39.8,19.325 ; -39.825,19.3 cw(c-39.8,19.3) -39.8,19.325 ; -39.8,-19.325 39.8,-19.325 ; -39.8,19.325 39.8,19.325 ; 39.8,-19.325 ccw(c39.8,-19.3) 39.825,-19.3 ; 39.8,-19.325 ccw(c39.8,-19.3) 39.825,-19.3 ; 39.8,19.325 cw(c39.8,19.3) 39.825,19.3 ; 39.8,19.325 cw(c39.8,19.3) 39.825,19.3 ; 39.825,-19.3 39.825,-11.325 41.2,-11.325 ; 39.825,19.3 39.825,11.325 41.2,11.325 ; 41.2,-11.325 ccw(c41.2,-11.3) 41.225,-11.3 ; 41.2,-11.325 ccw(c41.2,-11.3) 41.225,-11.3 ; 41.2,11.325 cw(c41.2,11.3) 41.225,11.3 ; 41.2,11.325 cw(c41.2,11.3) 41.225,11.3 ; 41.225,-11.3 41.225,11.3

## Other copper
Top Layer:
  rectangle net GND: 34.3,-5.8 38.9,-1.7
  rectangle net GND: 34.5,1.6 38.6,5.6

## Silkscreen, mask and mechanical layers (free items; w line width, h text height)
Top Overlay:
  region: -54.752,7.771
  lines w0.15: -33.983,-10.154 -33.983,-15.167 ccw(c-33.45,-15.167) -33.45,-15.7 -29.993,-15.7 cw(c-29.993,-15.704) -29.989,-15.704 15.609,-15.704 ccw(c15.609,-15.171) 16.142,-15.171 16.142,-7.533 cw(c16.675,-7.533) 16.675,-7 27.903,-7 ccw(c27.903,-6.467) 28.437,-6.467 28.437,4.992 cw(c28.97,4.992) 28.97,5.525 38.242,5.525 ccw(c38.242,6.058) 38.775,6.058 38.775,15.267 ccw(c38.242,15.267) 38.242,15.8 26.05,15.8 ; -33.981,-10.154 cw(c-33.447,-10.154) -33.447,-9.621 -29.99,-9.621 cw(c-29.99,-9.625) -29.986,-9.625 -27.475,-9.625 ; -28.813,-0.479 -28.813,1.246 ; -27.772,-9.628 cw(c-27.769,-9.628) -27.769,-9.625 -26.931,-9.625 ccw(c-26.931,-9.092) -26.397,-9.092 ; -27.363,-0.467 -27.363,1.258 ; -26.4,-9.092 -26.4,15.267 cw(c-25.867,15.267) -25.867,15.8 -25.655,15.8 26.425,15.8 ; 25.017,-13.976 27.257,-13.978 ; 26.107,-9.763 30.451,-9.763 ; 26.159,-13.418 30.503,-13.418 ; 26.476,-13.371 ccw(c26.446,-13.341) 26.488,-13.341 ; 26.476,-9.777 cw(c26.446,-9.807) 26.488,-9.807 ; 26.49,-13.398 26.49,-13.328 cw(c27.047,-13.328) 26.653,-12.934 cw(c26.637,-12.919) 26.637,-12.941 26.49,-12.941 ; 26.49,-13.391 26.49,-13.322 ccw(c25.933,-13.322) 26.327,-12.928 ccw(c26.342,-12.912) 26.342,-12.934 26.49,-12.934 ; 26.491,-10.035 26.491,-13.334 ccw(c26.533,-13.334) 26.503,-13.364 ; 26.491,-9.807 cw(c26.533,-9.807) 26.503,-9.777 ; 27.263,-13.978 ccw(c27.263,-13.573) 27.55,-13.86 27.591,-13.818 ccw(c27.472,-13.699) 27.641,-13.699 ; 27.637,-13.764 28.018,-8.894 cw(c28.325,-8.894) 28.108,-8.677 28.145,-8.714 cw(c27.839,-9.021) 28.272,-9.021 28.437,-9.185 ccw(c28.653,-8.968) 28.653,-9.275 29.796,-9.275 29.834,-9.312 cw(c29.617,-9.529) 29.923,-9.529 30.177,-14.99 ; 30.177,-14.978 30.177,-14.927 cw(c31.441,-14.927) 30.547,-14.033 cw(c30.684,-14.171) 30.684,-13.976 32.284,-13.976 ; 32.255,-13.976 34.966,-13.976 ; 26.49,-9.819 cw(c25.933,-9.819) 26.327,-10.213 cw(c26.342,-10.229) 26.342,-10.207 26.49,-10.207 26.637,-10.207 cw(c26.637,-10.229) 26.653,-10.213 cw(c27.047,-9.819) 26.49,-9.819 ; 26.49,-9.819 26.49,-9.75 26.49,-9.819
  text "!!! DANGER !!!" at 22.099,12.858 h2
  text "VP / ADJ" at -32.852,12.79 h2
  text "HIGH VOLTAGE ON WAVEGUIDE" at 16.142,11.208 h2
  text "DAMPING ADJUST" at 19.213,6.508 h2
  text "50R" at 27.32,-0.99 h0.85 r90
  text "2n2369" at 23.211,-5.688 h1.5
  text "2n2501" at 23.205,-6.688 h1.5
  text "90%" at 30.796,-10.503 h0.85
  text "GND" at -37.574,-11.267 h2
  text "VP" at -32.987,-11.267 h2
  text "t" at 24.622,-11.282 h0.85
  text "r" at 25.247,-11.632 h0.85
  text "10%" at 30.863,-13.418 h0.85
  text "Picosecond / Pulse Generator / Mk III" at -27.3,-20.75 h3 r90
Bottom Overlay:
  drawing of 82 lines, arcs and shapes, not listed
  text "SILICONVALLEYGARAGE" at 7.5,12.75 h2.3
  text "INSTRUMENTS" at 7.5,8.096 h2.3
  text "GIThub :" at 13.843,4.426 h2
  text "vincent-himpe/Jim-Williams-PulseGenerator" at 13.823,2.908 h2
  text "Original Design : Jim Williams" at 8.416,0.014 h2
  text "Linear Technologies / Analog Devices" at 10.853,-1.642 h2
  text "Application notes AN61 , AN94" at 8.986,-3.211 h2
  text "!!! DANGER !!!" at 2.721,-10.55 h2
  text "HIGH VOLTAGE ON CASCADE" at 7.561,-12.2 h2
Top Solder:
  circle w1.2: c23.25,3 r1.05
  circle w1.2: c23.25,-3 r1.05
  circle w3: c20.4,0 r2.9
  rectangle: 32,-5 42,5
  rectangle: -39.8,17.325 39.8,19.3
  rectangle: -39.8,-19.3 39.8,-17.325
  rectangle: 19.725,-6.3 21.075,-5.7
Bottom Solder:
  circle w3: c20.4,0 r2.9
  rectangle: -39.8,-19.3 39.8,-17.325
  rectangle: -39.8,17.325 39.8,19.3
Board:
  lines w0.05: -41.2,-11.3 -41.2,11.3 -40.3,11.3 ccw(c-40.3,11.8) -39.8,11.8 -39.8,19.3 39.8,19.3 39.8,11.8 ccw(c40.3,11.8) 40.3,11.3 41.2,11.3 41.2,-11.3 40.298,-11.3 40.3,-11.3 ccw(c40.3,-11.8) 39.8,-11.8 39.8,-19.3 -39.8,-19.3 -39.8,-11.8 ccw(c-40.3,-11.8) -40.3,-11.3 -41.2,-11.3

## Text inside footprints (layer, text, board x,y; h text height)
D1: Bottom Assembly "K" at -26.278,5.194 h1.5 r180
D2: Bottom Assembly "K" at -21.678,-1.115 h1.5
D3: Bottom Assembly "K" at -26.278,-1.615 h1.5 r180
D4: Bottom Assembly "K" at -21.678,-7.915 h1.5
D5: Bottom Assembly "K" at -26.278,-8.415 h1.5 r180
D6: Top Overlay "+" at -35.55,12.65 h0.8 r270
J2: Top Courtyard "BOARD EDGE" at 40.984,-2.15 h1 r90
LOGO1: Bottom Overlay "PUBLIC / DOMAIN" at 27.225,9.562 h2.5; Bottom Overlay "0" at 30.366,10.012 h5
U1: Bottom Assembly "1" at -27.853,7.946 h0.3 r270